# EAGLE board charlie_array_v1 (EAGLE 6.4)

Size 101.6 x 25.4 mm. Coordinates in mm from the lower left corner, seen from the top.
Outline: 0,0 101.6,0 101.6,25.4 0,25.4 0,0
Copper layers (1*2*15*16): Top 0.035mm / dielectric 0.2mm / layer 2 0.0175mm / dielectric 1.1mm / layer 15 0.0175mm / dielectric 0.2mm / Bottom 0.035mm
Design rules "SeeedStudio_DRU_no_angle_20130527": minimum track width 6mil, minimum drill 12mil, track to track 6mil, track to pad 6mil, pad to pad 6mil, via to via 6mil, smd to smd 0mil, copper to edge 10mil, drill to drill 10mil, minimum pad ring 6mil, minimum via ring 6mil, stop-mask expansion 2mil, vias tented up to drill 25mil, thermal gap 10mil

## Footprints (pad centres in the part's own frame; a part is rotated, then mirrored left to right if it is on the bottom)
C0603 = smd 1.1 x 1: 1 -0.85,0; 2 0.85,0
TACTILE_SWITCH_TALL = smd 1.55 x 1.3: A1 -3.975,-2.25; A2 3.975,-2.25; B1 -3.975,2.25; B2 3.975,2.25
TQFP32-08 = smd 1.27 x 0.559: 1 -4.293,2.8; 2 -4.293,2; 3 -4.293,1.2; 4 -4.293,0.4; 5 -4.293,-0.4; 6 -4.293,-1.2; 7 -4.293,-2; 8 -4.293,-2.8; 17 4.293,-2.8; 18 4.293,-2; 19 4.293,-1.2; 20 4.293,-0.4; 21 4.293,0.4; 22 4.293,1.2; 23 4.293,2; 24 4.293,2.8 | smd 0.559 x 1.27: 9 -2.8,-4.293; 10 -2,-4.293; 11 -1.2,-4.293; 12 -0.4,-4.293; 13 0.4,-4.293; 14 1.2,-4.293; 15 2,-4.293; 16 2.8,-4.293; 25 2.8,4.293; 26 2,4.293; 27 1.2,4.293; 28 0.4,4.293; 29 -0.4,4.293; 30 -1.2,4.293; 31 -2,4.293; 32 -2.8,4.293
2X3_ICSP_SMD = smd 1.905 x 3.81: P$1 -2.54,-2.54; P$2 0,-2.54; P$3 2.54,-2.54; P$4 0,2.54; P$5 2.54,2.54; P$7 -2.54,2.54
CHIPLED_0603 = smd 0.8 x 0.8: A 0,-0.75; C 0,0.75
FA-128 = smd 0.95 x 0.85: 1 -0.725,-0.575; 2 0.725,-0.575; 3 0.725,0.575; 4 -0.725,0.575
R0603 = smd 1 x 1.1: 1 -0.85,0; 2 0.85,0
TP20SQ = smd 2 x 2: TP 0,0

## Placement (x,y rotation side)
C1  [C0603]  58.42,10.79 0 bottom
C2  [C0603]  58.42,5.71 180 bottom
DOWNSW  SWITCH-MOMENTARY-2  [TACTILE_SWITCH_TALL]  74.93,12.7 0 bottom
IC1  MEGA8-AI  [TQFP32-08]  50.8,12.7 0 bottom
J1  AVR_SPI_PRG_6  [2X3_ICSP_SMD]  50.16,3.81 0 top
L1_2  [CHIPLED_0603]  2.54,20.74 180 top
L1_3  [CHIPLED_0603]  10.58,20.74 180 top
L1_4  [CHIPLED_0603]  18.63,20.74 180 top
L1_5  [CHIPLED_0603]  26.67,20.74 180 top
L1_6  [CHIPLED_0603]  34.71,20.74 180 top
L1_7  [CHIPLED_0603]  42.76,20.74 180 top
L1_8  [CHIPLED_0603]  50.8,20.74 180 top
L1_9  [CHIPLED_0603]  58.84,20.74 180 top
L1_10  [CHIPLED_0603]  66.89,20.74 180 top
L1_11  [CHIPLED_0603]  74.93,20.74 180 top
L1_12  [CHIPLED_0603]  82.97,20.74 180 top
L2_1  [CHIPLED_0603]  6.56,20.74 0 top
L2_3  [CHIPLED_0603]  91.02,20.74 180 top
L2_4  [CHIPLED_0603]  99.06,20.74 180 top
L2_5  [CHIPLED_0603]  6.56,16.72 180 top
L2_6  [CHIPLED_0603]  14.61,16.72 180 top
L2_7  [CHIPLED_0603]  22.65,16.72 180 top
L2_8  [CHIPLED_0603]  30.69,16.72 180 top
L2_9  [CHIPLED_0603]  38.73,16.72 180 top
L2_10  [CHIPLED_0603]  46.78,16.72 180 top
L2_11  [CHIPLED_0603]  54.82,16.72 180 top
L2_12  [CHIPLED_0603]  62.87,16.72 180 top
L3_1  [CHIPLED_0603]  14.61,20.74 0 top
L3_2  [CHIPLED_0603]  95.04,20.74 0 top
L3_4  [CHIPLED_0603]  70.91,16.72 180 top
L3_5  [CHIPLED_0603]  78.95,16.72 180 top
L3_6  [CHIPLED_0603]  87,16.72 180 top
L3_7  [CHIPLED_0603]  95.04,16.72 180 top
L3_8  [CHIPLED_0603]  2.54,12.7 0 top
L3_9  [CHIPLED_0603]  10.58,12.7 0 top
L3_10  [CHIPLED_0603]  18.63,12.7 0 top
L3_11  [CHIPLED_0603]  26.67,12.7 0 top
L3_12  [CHIPLED_0603]  34.71,12.7 0 top
L4_1  [CHIPLED_0603]  22.65,20.74 0 top
L4_2  [CHIPLED_0603]  2.54,16.72 0 top
L4_3  [CHIPLED_0603]  74.93,16.72 0 top
L4_5  [CHIPLED_0603]  42.76,12.7 0 top
L4_6  [CHIPLED_0603]  50.8,12.7 0 top
L4_7  [CHIPLED_0603]  58.84,12.7 0 top
L4_8  [CHIPLED_0603]  66.89,12.7 0 top
L4_9  [CHIPLED_0603]  74.93,12.7 0 top
L4_10  [CHIPLED_0603]  82.97,12.7 0 top
L4_11  [CHIPLED_0603]  91.02,12.7 0 top
L4_12  [CHIPLED_0603]  99.06,12.7 0 top
L5_1  [CHIPLED_0603]  30.69,20.74 0 top
L5_2  [CHIPLED_0603]  10.58,16.72 0 top
L5_3  [CHIPLED_0603]  82.97,16.72 0 top
L5_4  [CHIPLED_0603]  46.78,12.7 180 top
L5_6  [CHIPLED_0603]  6.56,8.68 0 top
L5_7  [CHIPLED_0603]  14.61,8.68 0 top
L5_8  [CHIPLED_0603]  22.65,8.68 0 top
L5_9  [CHIPLED_0603]  30.69,8.68 0 top
L5_10  [CHIPLED_0603]  38.73,8.68 0 top
L5_11  [CHIPLED_0603]  46.78,8.68 0 top
L5_12  [CHIPLED_0603]  54.82,8.68 0 top
L6_1  [CHIPLED_0603]  38.73,20.74 0 top
L6_2  [CHIPLED_0603]  18.63,16.72 0 top
L6_3  [CHIPLED_0603]  91.02,16.72 0 top
L6_4  [CHIPLED_0603]  54.82,12.7 180 top
L6_5  [CHIPLED_0603]  10.58,8.68 180 top
L6_7  [CHIPLED_0603]  62.87,8.68 180 top
L6_8  [CHIPLED_0603]  70.91,8.68 0 top
L6_9  [CHIPLED_0603]  78.95,8.68 0 top
L6_10  [CHIPLED_0603]  87,8.68 0 top
L6_11  [CHIPLED_0603]  95.04,8.68 0 top
L6_12  [CHIPLED_0603]  2.54,4.66 0 top
L7_1  [CHIPLED_0603]  46.78,20.74 0 top
L7_2  [CHIPLED_0603]  26.67,16.72 0 top
L7_3  [CHIPLED_0603]  99.06,16.72 0 top
L7_4  [CHIPLED_0603]  62.87,12.7 180 top
L7_5  [CHIPLED_0603]  18.63,8.68 180 top
L7_6  [CHIPLED_0603]  66.89,8.68 0 top
L7_8  [CHIPLED_0603]  10.58,4.66 0 top
L7_9  [CHIPLED_0603]  18.63,4.66 0 top
L7_10  [CHIPLED_0603]  26.67,4.66 0 top
L7_11  [CHIPLED_0603]  34.71,4.66 0 top
L7_12  [CHIPLED_0603]  42.76,4.66 0 top
L8_1  [CHIPLED_0603]  54.82,20.74 0 top
L8_2  [CHIPLED_0603]  34.71,16.72 0 top
L8_3  [CHIPLED_0603]  6.56,12.7 180 top
L8_4  [CHIPLED_0603]  70.91,12.7 180 top
L8_5  [CHIPLED_0603]  26.67,8.68 180 top
L8_6  [CHIPLED_0603]  74.93,8.68 180 top
L8_7  [CHIPLED_0603]  14.61,4.66 180 top
L8_9  [CHIPLED_0603]  50.8,4.66 0 top
L8_10  [CHIPLED_0603]  58.84,4.66 0 top
L8_11  [CHIPLED_0603]  66.89,4.66 0 top
L8_12  [CHIPLED_0603]  74.93,4.66 0 top
L9_1  [CHIPLED_0603]  62.87,20.74 0 top
L9_2  [CHIPLED_0603]  42.76,16.72 0 top
L9_3  [CHIPLED_0603]  14.61,12.7 180 top
L9_4  [CHIPLED_0603]  78.95,12.7 180 top
L9_5  [CHIPLED_0603]  34.71,8.68 180 top
L9_6  [CHIPLED_0603]  82.97,8.68 180 top
L9_7  [CHIPLED_0603]  22.65,4.66 180 top
L9_8  [CHIPLED_0603]  54.82,4.66 180 top
L9_10  [CHIPLED_0603]  82.97,4.66 0 top
L9_11  [CHIPLED_0603]  91.02,4.66 0 top
L9_12  [CHIPLED_0603]  99.06,4.66 0 top
L10_1  [CHIPLED_0603]  70.91,20.74 0 top
L10_2  [CHIPLED_0603]  50.8,16.72 0 top
L10_3  [CHIPLED_0603]  22.65,12.7 180 top
L10_4  [CHIPLED_0603]  87,12.7 180 top
L10_5  [CHIPLED_0603]  42.76,8.68 180 top
L10_6  [CHIPLED_0603]  91.02,8.68 180 top
L10_7  [CHIPLED_0603]  30.69,4.66 180 top
L10_8  [CHIPLED_0603]  62.87,4.66 180 top
L10_9  [CHIPLED_0603]  87,4.66 180 top
L10_11  [CHIPLED_0603]  42.76,23.5 0 bottom
L10_12  [CHIPLED_0603]  50.8,23.5 0 bottom
L11_1  [CHIPLED_0603]  78.95,20.74 0 top
L11_2  [CHIPLED_0603]  58.84,16.72 0 top
L11_3  [CHIPLED_0603]  30.69,12.7 180 top
L11_4  [CHIPLED_0603]  95.04,12.7 180 top
L11_5  [CHIPLED_0603]  50.8,8.68 180 top
L11_6  [CHIPLED_0603]  99.06,8.68 180 top
L11_7  [CHIPLED_0603]  38.73,4.66 180 top
L11_8  [CHIPLED_0603]  70.91,4.66 180 top
L11_9  [CHIPLED_0603]  95.04,4.66 180 top
L11_10  [CHIPLED_0603]  46.78,23.5 180 bottom
L11_12  [CHIPLED_0603]  58.84,23.5 0 bottom
L12_1  [CHIPLED_0603]  87,20.74 0 top
L12_2  [CHIPLED_0603]  66.89,16.72 0 top
L12_3  [CHIPLED_0603]  38.73,12.7 180 top
L12_4  [CHIPLED_0603]  2.54,8.68 0 top
L12_5  [CHIPLED_0603]  58.84,8.68 180 top
L12_6  [CHIPLED_0603]  6.56,4.66 180 top
L12_7  [CHIPLED_0603]  46.78,4.66 180 top
L12_8  [CHIPLED_0603]  78.95,4.66 180 top
L12_9  [CHIPLED_0603]  38.73,23.5 0 bottom
L12_10  [CHIPLED_0603]  54.82,23.5 180 bottom
L12_11  [CHIPLED_0603]  62.87,23.5 180 bottom
Q1  FA-128  [FA-128]  58.42,8.26 270 bottom
R1  [R0603]  31.75,23.5 90 bottom
R2  [R0603]  36.2,23.5 90 bottom
R3  [R0603]  65.41,23.5 90 bottom
R4  [R0603]  69.85,23.5 90 bottom
R5  [R0603]  74.93,23.5 90 bottom
R6  [R0603]  80.01,23.5 90 bottom
R7  [R0603]  85.09,23.5 90 bottom
R8  [R0603]  90.17,23.5 90 bottom
R9  [R0603]  11.43,23.5 90 bottom
R10  [R0603]  16.51,23.5 90 bottom
R11  [R0603]  21.59,23.5 90 bottom
R12  [R0603]  26.67,23.5 90 bottom
TP1  TPTP20SQ  [TP20SQ]  40.64,13.34 0 bottom
TP2  TPTP20SQ  [TP20SQ]  60.96,13.34 0 bottom
UPSW  SWITCH-MOMENTARY-2  [TACTILE_SWITCH_TALL]  26.67,12.7 0 bottom

## Library data of the parts
C1 C2 R1-R12 = rcl
DOWNSW J1 UPSW = SparkFun
IC1 = atmel; MPN: ATMEGA8-16AU; OC_FARNELL: 9171371; OC_NEWARK: 73M8863
L1_2-L1_12 L2_1 L2_3-L2_12 L3_1 L3_2 L3_4-L3_12 L4_1-L4_3 L4_5-L4_12 L5_1-L5_4 L5_6-L5_12 L6_1-L6_5 L6_7-L6_12 L7_1-L7_6 L7_8-L7_12 L8_1-L8_7 L8_9-L8_12 L9_1-L9_8 L9_10-L9_12 L10_1-L10_9 L10_11 L10_12 L11_1-L11_10 L11_12 L12_1-L12_11 = led
Q1 = crystal
TP1 TP2 = testpad

## Nets
+5V: IC1.4 IC1.6 J1.P$2 TP2.TP
AVCC: IC1.18
D1: IC1.30 R1.1
D2: IC1.31 R2.1
D3: IC1.32 R3.1
D4: IC1.1 R4.1
D5: IC1.2 R5.1
D6: IC1.9 R6.1
D7: IC1.10 R7.1
D8: IC1.11 R8.1
D9: IC1.23 R9.1
D10: IC1.24 R10.1
D11: IC1.25 R11.1
D12: IC1.26 R12.1
DR1: L1_2.A L1_3.A L1_4.A L1_5.A L1_6.A L1_7.A L1_8.A L1_9.A L1_10.A L1_11.A L1_12.A L2_1.C L3_1.C L4_1.C L5_1.C L6_1.C L7_1.C L8_1.C L9_1.C L10_1.C L11_1.C L12_1.C R1.2
DR2: L1_2.C L2_1.A L2_3.A L2_4.A L2_5.A L2_6.A L2_7.A L2_8.A L2_9.A L2_10.A L2_11.A L2_12.A L3_2.C L4_2.C L5_2.C L6_2.C L7_2.C L8_2.C L9_2.C L10_2.C L11_2.C L12_2.C R2.2
DR3: L1_3.C L2_3.C L3_1.A L3_2.A L3_4.A L3_5.A L3_6.A L3_7.A L3_8.A L3_9.A L3_10.A L3_11.A L3_12.A L4_3.C L5_3.C L6_3.C L7_3.C L8_3.C L9_3.C L10_3.C L11_3.C L12_3.C R3.2
DR4: L1_4.C L2_4.C L3_4.C L4_1.A L4_2.A L4_3.A L4_5.A L4_6.A L4_7.A L4_8.A L4_9.A L4_10.A L4_11.A L4_12.A L5_4.C L6_4.C L7_4.C L8_4.C L9_4.C L10_4.C L11_4.C L12_4.C R4.2
DR5: L1_5.C L2_5.C L3_5.C L4_5.C L5_1.A L5_2.A L5_3.A L5_4.A L5_6.A L5_7.A L5_8.A L5_9.A L5_10.A L5_11.A L5_12.A L6_5.C L7_5.C L8_5.C L9_5.C L10_5.C L11_5.C L12_5.C R5.2
DR6: L1_6.C L2_6.C L3_6.C L4_6.C L5_6.C L6_1.A L6_2.A L6_3.A L6_4.A L6_5.A L6_7.A L6_8.A L6_9.A L6_10.A L6_11.A L6_12.A L7_6.C L8_6.C L9_6.C L10_6.C L11_6.C L12_6.C R6.2
DR7: L1_7.C L2_7.C L3_7.C L4_7.C L5_7.C L6_7.C L7_1.A L7_2.A L7_3.A L7_4.A L7_5.A L7_6.A L7_8.A L7_9.A L7_10.A L7_11.A L7_12.A L8_7.C L9_7.C L10_7.C L11_7.C L12_7.C R7.2
DR8: L1_8.C L2_8.C L3_8.C L4_8.C L5_8.C L6_8.C L7_8.C L8_1.A L8_2.A L8_3.A L8_4.A L8_5.A L8_6.A L8_7.A L8_9.A L8_10.A L8_11.A L8_12.A L9_8.C L10_8.C L11_8.C L12_8.C R8.2
DR9: L1_9.C L2_9.C L3_9.C L4_9.C L5_9.C L6_9.C L7_9.C L8_9.C L9_1.A L9_2.A L9_3.A L9_4.A L9_5.A L9_6.A L9_7.A L9_8.A L9_10.A L9_11.A L9_12.A L10_9.C L11_9.C L12_9.C R9.2
DR10: L1_10.C L2_10.C L3_10.C L4_10.C L5_10.C L6_10.C L7_10.C L8_10.C L9_10.C L10_1.A L10_2.A L10_3.A L10_4.A L10_5.A L10_6.A L10_7.A L10_8.A L10_9.A L10_11.A L10_12.A L11_10.C L12_10.C R10.2
DR11: L1_11.C L2_11.C L3_11.C L4_11.C L5_11.C L6_11.C L7_11.C L8_11.C L9_11.C L10_11.C L11_1.A L11_2.A L11_3.A L11_4.A L11_5.A L11_6.A L11_7.A L11_8.A L11_9.A L11_10.A L11_12.A L12_11.C R11.2
DR12: L1_12.C L2_12.C L3_12.C L4_12.C L5_12.C L6_12.C L7_12.C L8_12.C L9_12.C L10_12.C L11_12.C L12_1.A L12_2.A L12_3.A L12_4.A L12_5.A L12_6.A L12_7.A L12_8.A L12_9.A L12_10.A L12_11.A R12.2
GNDA: C1.2 C2.2 DOWNSW.B2 IC1.3 IC1.5 IC1.21 J1.P$7 TP1.TP UPSW.B2
MISO: IC1.16 J1.P$1
MOSI: IC1.15 J1.P$4
N$1: C2.1 IC1.8 Q1.3
N$2: IC1.14 UPSW.A2
N$3: DOWNSW.A2 IC1.13
N$4: C1.1 IC1.7 Q1.1
RESET: IC1.29 J1.P$5
SCK: IC1.17 J1.P$3

## Tracks (layer width: path | path; a pad name or v marks a point on that pad's centre or on a via)
+5V  (3 unrouted)
D1  (1 unrouted)
D2  (1 unrouted)
D3  (1 unrouted)
D4  (1 unrouted)
D5  (1 unrouted)
D6  (1 unrouted)
D7  (1 unrouted)
D8  (1 unrouted)
D9  (1 unrouted)
D10  (1 unrouted)
D11  (1 unrouted)
D12  (1 unrouted)
DR1  (22 unrouted)
DR2  (22 unrouted)
DR3  (22 unrouted)
DR4  (22 unrouted)
DR5  (22 unrouted)
DR6  (22 unrouted)
DR7  (22 unrouted)
DR8  (22 unrouted)
DR9  (22 unrouted)
DR10  (22 unrouted)
DR11  (22 unrouted)
DR12  (22 unrouted)
GNDA  (8 unrouted)
MISO  (1 unrouted)
MOSI  (1 unrouted)
N$1  (2 unrouted)
N$2  (1 unrouted)
N$3  (1 unrouted)
N$4  (2 unrouted)
RESET  (1 unrouted)
SCK  (1 unrouted)